# Altium PCB RHR077_GFC_ECAT_LED_REV1.PcbDoc
Units mil, origin at the board's own origin, x right, y up, seen from the top; angles counter-clockwise.
Board outline 1968.5 x 984.25 mil, 2 copper layers (Top Layer, Bottom Layer); 37 components, 25 nets, 138 pads, 128 vias.
Unrouted connection lines stored in the file: 21.
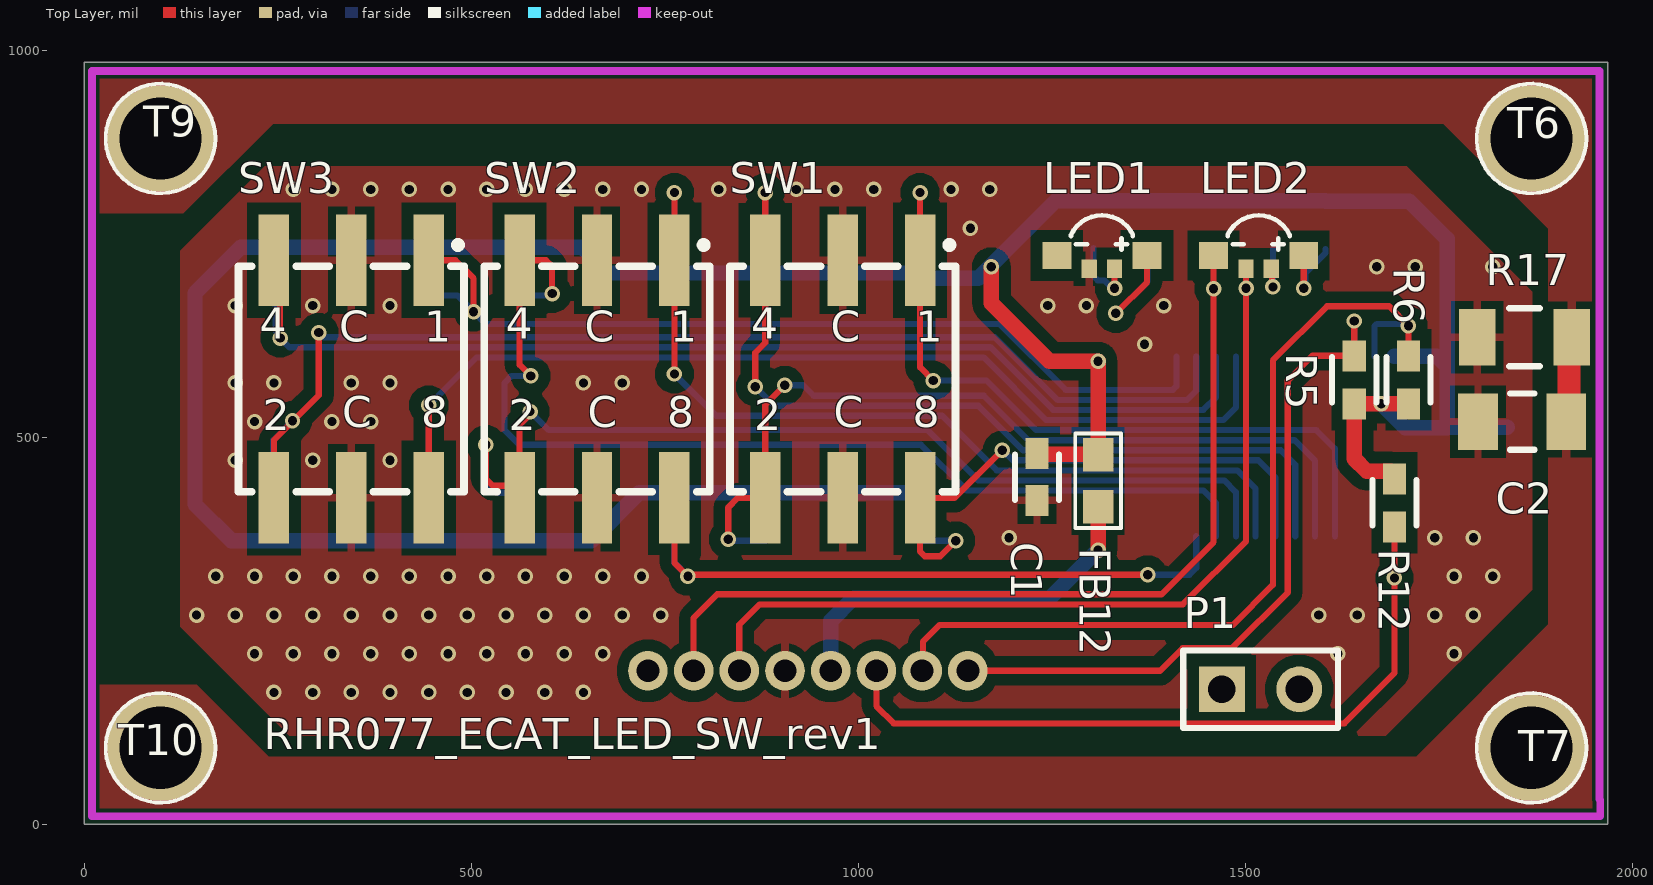
[diagram p0: Top Layer view]
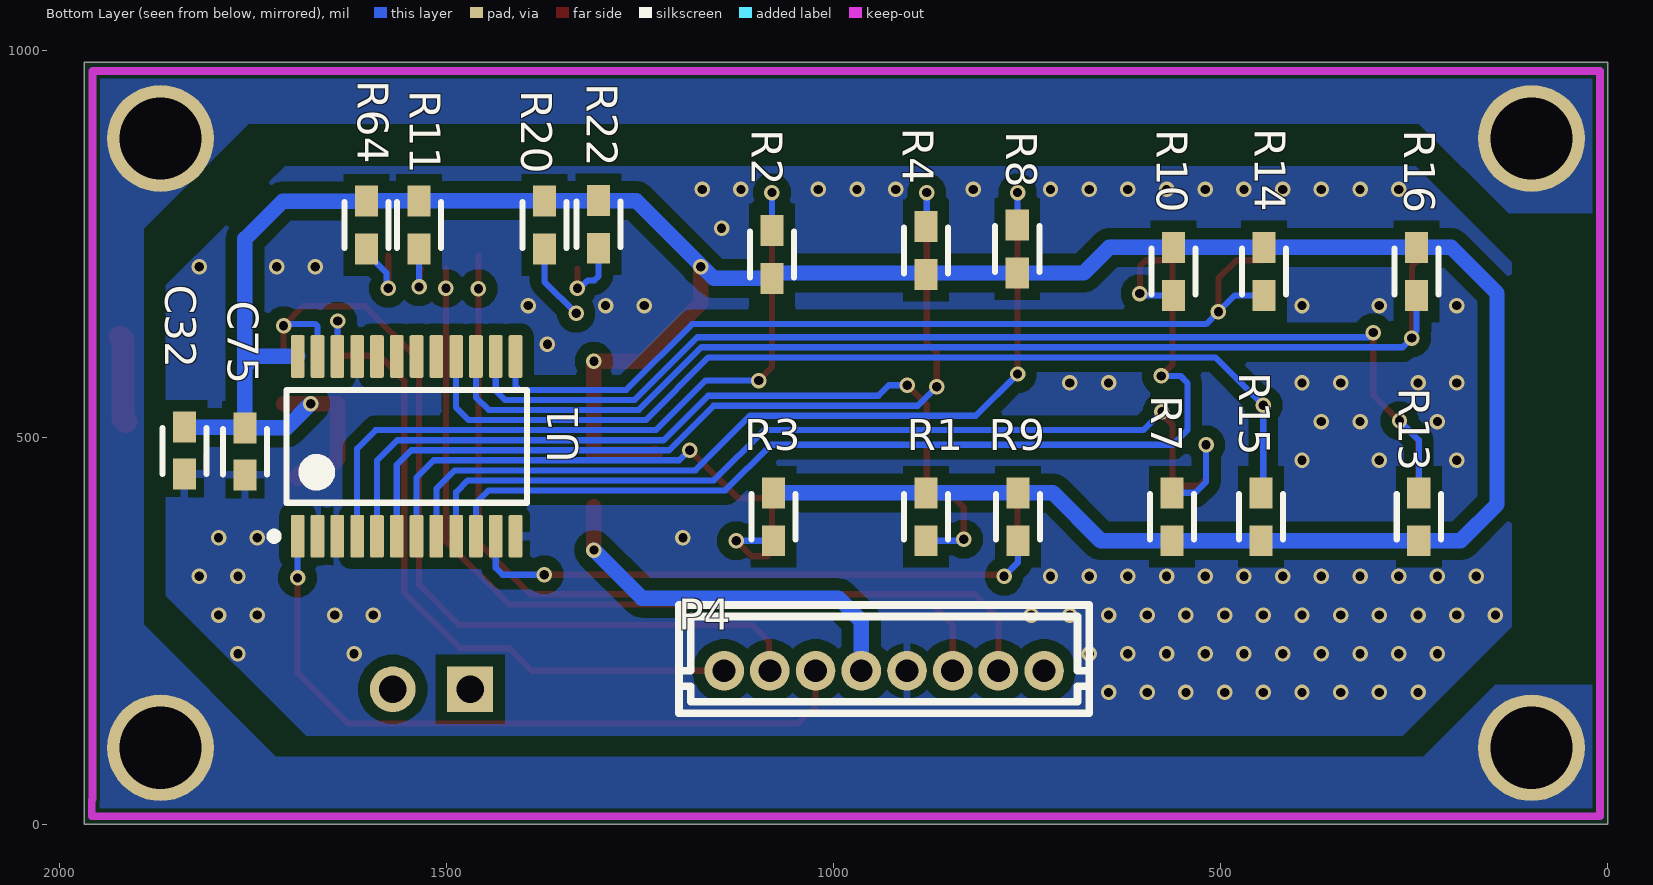
[diagram p1: Bottom Layer view, seen from below]
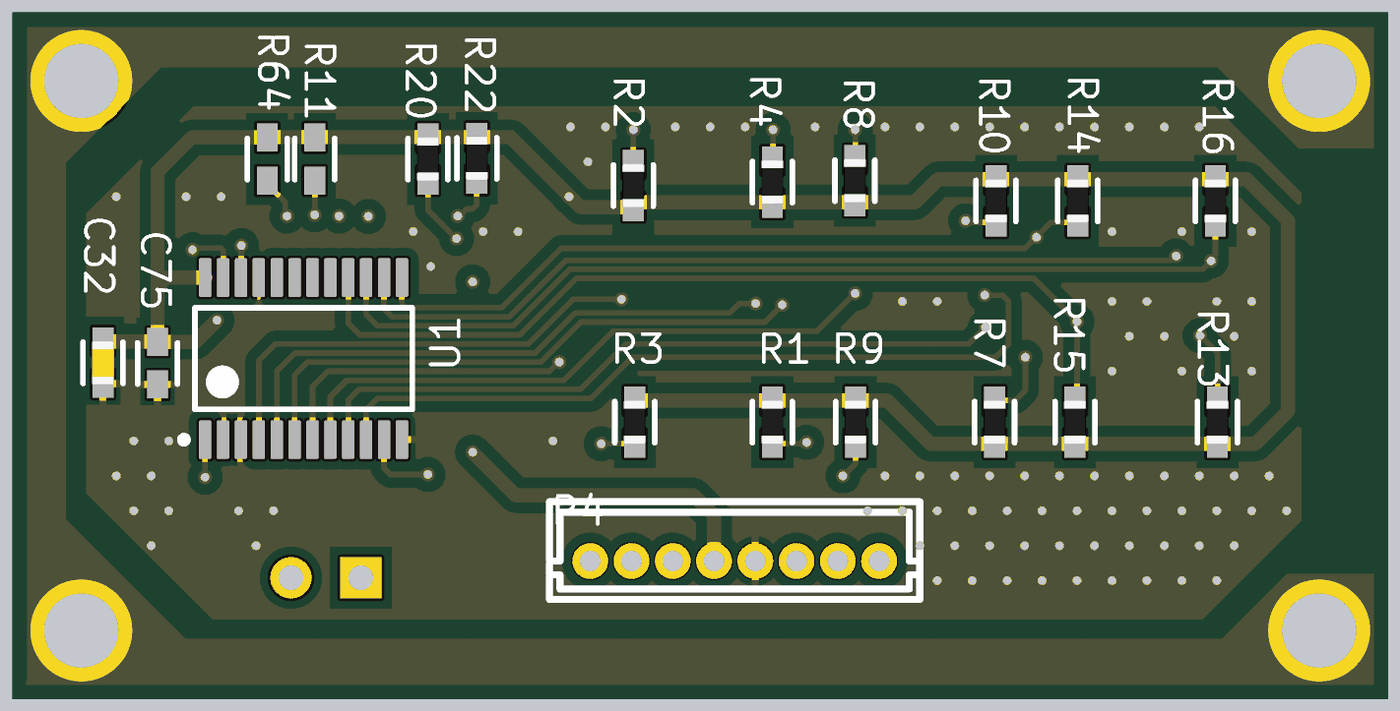
[diagram p2: 3D render of the assembled board from below, using the file's embedded part models]

## Layer stack, top to bottom
Top Solder: solder mask 0.4, Solder Resist, Dk 3.5
Top Layer: signal copper 1.4
Dielectric1: dielectric 12.6, FR-4, Dk 4.8
Bottom Layer: signal copper 1.4
Bottom Solder: solder mask 0.4, Solder Resist, Dk 3.5

## Board outline
0,0 0,984.25 1968.5,984.25 1968.5,0

## Design rules (kind name [scope] priority, off if disabled: settings)
Clearance Clearance_1 [InNet('DGND') And InPolygon] p1: gap=15 ignorepadtopadclearanceinfootprint=FALSE
Clearance [All] p2: gap=5 ignorepadtopadclearanceinfootprint=FALSE
PolygonConnect PolygonConnect_1 [InNet('EARTH')] p1: thpad.connectstyle=Direct thpad.reliefconductorwidth=10 thpad.reliefentries=4 thpad.polygonreliefangle="90 Angle" thpad.airgapwidth=10 smdpad.connectstyle=Relief smdpad.reliefconductorwidth=10 smdpad.reliefentries=4 smdpad.polygonreliefangle="90 Angle" smdpad.airgapwidth=10 via.connectstyle=Relief via.reliefconductorwidth=10 via.reliefentries=4 via.polygonreliefangle="90 Angle" via.airgapwidth=10
PolygonConnect [All] p2: connectstyle=Relief reliefconductorwidth=10 reliefentries=4 polygonreliefangle="90 Angle" airgapwidth=10
RoutingVias [All] p1: holewidth=28 width=50 viastyle="Through Hole" minholewidth=28 minwidth=50 maxholewidth=28 maxwidth=50
SilkToSolderMaskClearance SilkscreenOverComponentPads [IsPad] p1: minsilkscreentomaskgap=10 clearancetoexposedcopper=TRUE
SolderMaskExpansion [All] p1: expansion=4 istentingtop=FALSE
Width [All] p1: maxlimit=100 minlimit=5 preferedwidth=10
29 further rules are at their usual default settings.

## Components (designator, comment, footprint, x,y, rotation, side; value= is the part's Value field where it differs from the comment)
C1 "Capacitor_0603" CAPC1608X092N_0603 1231,448 r270 top value=10uF/25V
C2 "Capacitor_1206" CAPC3216X156N_1206 1858,520 r0 top value=0.01u
C32 "Capacitor_0603" CAPC1608X092N_0603 1839,482 r270 bottom value=0.1uF/50V
C75 "Capacitor_0603" CAPC1608X092N_0603 1761,481 r270 bottom value=0.1u
FB12 "FBC0603" FBC0603 1310,410 r90 top value="600 Ohms @ 100MHz"
LED1 "TJ-S3210SW5TCGLC2R2G-A5" LED-SMD_4P-L3.2-W1.5_TJ-S3210SW5TCGLC2R2G 1315,726.15 r0 top locked
LED2 "TJ-S3210SW5TCGLC2R2G-A5" LED-SMD_4P-L3.2-W1.5_TJ-S3210SW5TCGLC2R2G 1517.5,726.15 r0 top locked
P1 "Header 2" HDR1X2 1470,174 r0 top
P4 "HC-ZH-8PWT" CONN-TH_HC-ZH1.5-8A 935,198 r180 bottom locked
R1 "Resistor_0402" RESC1608X055N_0603 881,397.02 r90 bottom value=10k
R2 "Resistor_0402" RESC1608X055N_0603 1080,736.02 r270 bottom value=10k
R3 "Resistor_0402" RESC1608X055N_0603 1078,397.02 r90 bottom value=10k
R4 "Resistor_0402" RESC1608X055N_0603 881,741.02 r270 bottom value=10k
R5 "Resistor_0402" RESC1608X055N_0603 1641,574 r270 top value=10k
R6 "Resistor_0402" RESC1608X055N_0603 1711,573.98 r270 top value=10k
R7 "Resistor_0402" RESC1608X055N_0603 563,397.02 r270 bottom value=10k
R8 "Resistor_0402" RESC1608X055N_0603 763,743 r270 bottom value=10k
R9 "Resistor_0402" RESC1608X055N_0603 762,397.02 r90 bottom value=10k
R10 "Resistor_0402" RESC1608X055N_0603 561,714 r90 bottom value=10k
R11 "Resistor_0603" RESC1608X055N_0603 1536,774 r90 bottom value=1k
R12 "Resistor_0402" RESC1608X055N_0603 1693,415 r90 top value=10k
R13 "Resistor_0402" RESC1608X055N_0603 244,397.02 r270 bottom value=10k
R14 "Resistor_0402" RESC1608X055N_0603 444,714 r90 bottom value=10k
R15 "Resistor_0402" RESC1608X055N_0603 448,397.02 r270 bottom value=10k
R16 "Resistor_0402" RESC1608X055N_0603 247,714 r90 bottom value=10k
R17 "Resistor_1206" RESC3216X070N_1206 1861,629 r180 top value=1Meg
R20 "Resistor_0603" RESC1608X055N_0603 1374,773.98 r90 bottom value=1k
R22 "Resistor_0603" RESC1608X055N_0603 1304,775 r90 bottom value=1k
R64 "Resistor_0603" RESC1608X055N_0603 1604,773.98 r90 bottom value=1k
SW1 "SKAR-16S" SW-SMD_SM_STAR-10S 980,575 r0 top locked
SW2 "SKAR-16S" SW-SMD_SM_STAR-10S 662.5,575 r0 top locked
SW3 "SKAR-16S" SW-SMD_SM_STAR-10S 345,575 r0 top locked
T6 "TP" FIX-2.5 1870.08,885.83 r0 top locked
T7 "TP" FIX-2.5 1870.08,98.43 r0 top locked
T9 "TP" FIX-2.5 98.43,885.83 r0 top locked
T10 "TP" FIX-2.5 98.43,98.43 r0 top locked
U1 "XL9535" XNLD-TSSOP24_N 1552,488 r90 bottom

## Footprints (in the part's own frame and the unit in brackets; to place one, negate y for a bottom-side part, rotate by r counter-clockwise, add the part's x,y. Pads: shape width x height; smd on the part's side, far side on the other; paste and mask are expansions set on the pad)
CAPC1608X092N_0603 [mil] "Chip Capacitor, 0603"
  round 10 on Mech3: 0(0,0)
  rect 40x30 smd: 1(-30.98,0) 2(30,0)
  silkscreen extent -30,-29 30,29, body extent -31,-16 31,16, height 36
CAPC3216X156N_1206 [mm] "Chip Capacitor, 1206"
  round 0.254 on Mech3: 0(0,0)
  rect 1.3x1.85 smd: 1(-1.45,0) 2(1.45,0)
  silkscreen extent -0.4,-0.92 0.4,0.93, body extent -1.6,-0.8 1.6,0.8, height 1.52
CONN-TH_HC-ZH1.5-8A [mm]
  round 1.3 hole 0.75 paste-2539.97 mask+0.05: 1(-5.25,0) 2(-3.75,0) 3(-2.25,0) 4(-0.75,0) 5(0.75,0) 6(2.25,0) 7(3.75,0) 8(5.25,0)
  silkscreen extent -6.73,-1.4 6.73,2.16
FBC0603 [mm]
  rect 1.1x1 smd: 1(0,0)
  rect 1.1x1 smd mask+0.102: 2(1.7,0)
  silkscreen extent -0.7,-0.75 2.4,0.75, body extent 0.05,-0.41 1.65,0.41, height 0.84
FIX-2.5 [mm]
  round 3.5 hole 2.7: 1(0,0)
  silkscreen extent -1.8,-1.8 1.8,1.8
HDR1X2 [mm] "Connector; Header; 2 Position"
  rect 1.5x1.5 hole 0.9: 1(0,0)
  round 1.5 hole 0.9: 2(2.54,0)
  silkscreen extent -1.27,-1.27 3.81,1.27
LED-SMD_4P-L3.2-W1.5_TJ-S3210SW5TCGLC2R2G [mm]
  rect 0.95x0.9 smd: 1(1.48,0.216) 4(-1.48,0.216)
  rect 0.5x0.6 smd: 2(0.415,-0.216) 3(-0.415,-0.216)
  silkscreen extent -1.02,0.41 1.02,1.53
RESC1608X055N_0603 [mil] "Chip Resistor, 0603"
  round 10 on Mech3: 0(0,0)
  rect 40x30 smd: 1(-30.98,0) 2(30.98,0)
  silkscreen extent -30,-29 30,29, body extent -31,-16 31,16, height 22
RESC3216X070N_1206 [mm] "Chip Resistor, 1206"
  round 0.254 on Mech3: 0(0,0)
  rect 1.2x1.85 smd: 1(-1.55,0) 2(1.55,0)
  silkscreen extent -0.5,-0.95 0.5,0.95, body extent -1.55,-0.75 1.55,0.75, height 0.7
SW-SMD_SM_STAR-10S [mm]
  rect 1x3 smd paste+0 mask+0.05: 1(2.54,3.9) 2(-2.54,-3.9) 4(-2.54,3.9) 8(2.54,-3.9) C(0,-3.9) C(0,3.9)
  silkscreen extent -3.7,-3.7 3.7,4.5
XNLD-TSSOP24_N [mm] "SOP, 24-Leads, Body 7.9x4.5mm, Pitch 0.65mm, IPC Medium Density"
  rrect22% 1.4x0.45 smd: 1(-2.95,3.575) 2(-2.95,2.925) 3(-2.95,2.275) 4(-2.95,1.625) 5(-2.95,0.975) 6(-2.95,0.325) 7(-2.95,-0.325) 8(-2.95,-0.975) 9(-2.95,-1.625) 10(-2.95,-2.275) 11(-2.95,-2.925) 12(-2.95,-3.575) 13(2.95,-3.575) 14(2.95,-2.925) 15(2.95,-2.275) 16(2.95,-1.625) 17(2.95,-0.975) 18(2.95,-0.325) 19(2.95,0.325) 20(2.95,0.975) 21(2.95,1.625) 22(2.95,2.275) 23(2.95,2.925) 24(2.95,3.575)
  silkscreen extent -3.07,-3.95 1.85,4.47, body extent -3.21,-3.9 3.21,3.9, height 1

## Part data
C1 C32: Package=0603, PartNumber=C0603C104M5RACTU, TempCo=[tempco], Tolerance=[tol], Voltage Rating=[voltage], SupplierDescription="CAP CER 0.1UF 50V X7R 0603"
C2: "Capacitor, MLCC", Package=1206, PartNumber=C1206C103KCRACTU, TempCo=[tempco], Tolerance=[tol], Voltage Rating=[voltage], ComponentLink1Description=Datasheet, SupplierDescription="CAP CER 10000PF 500V X7R 1206"
C75: "Capacitor, MLCC", Manufacturer=KEMET, Package=0603, PartNumber=C0603C104M5RACTU, TempCo=[tempco], Tolerance=[tol], Voltage Rating=[voltage], ComponentLink1Description=Datasheet, SupplierDescription="CAP CER 0.1UF 50V X7R 0603"
FB12: PartNumber=PE-0603PFB121ST, SupplierDescription="FERRITE BEAD 600 OHM 0603 1LN"
LED1 LED2: Color Temperature=-, Forward Current=20mA, JLCPCB Part Class="Extended Part", Add into BOM=yes, Convert to PCB=yes, Datasheet=https://atta.szlcsc.com/upload/public/pdf/source/20200618/C601680_03E6561E1E751F1BA8F42F573334542B.pdf, Device=TJ-S3210SW5TCGLC2R2G-A5, Diode Configuration=-, Manufacturer Part=TJ-S3210SW5TCGLC2R2G-A5, Supplier=LCSC, Supplier Footprint=SMD,1.5x3.2mm, Supplier Part=C601680, Symbol=TJ-S3210SW5TCGLC2R2G-A5
P1: "Header, 2-Pin", LatestRevisionDate=17-Jul-2002, LatestRevisionNote="Re-released for DXP Platform.", Publisher="Altium Limited"
P4: library part "Header 8", "Header, 8-Pin", LatestRevisionDate=17-Jul-2002, LatestRevisionNote="Re-released for DXP Platform.", Publisher="Altium Limited"
R1 R2 R3 R4 R5 R6 R7 R8 R9 R10 R12 R13 R14 R15 R16: "Resistor, Standard", Manufacturer=Panasonic, Package=0402, PartNumber=ERJ-2RKF1002X, Power Rating=[power], TempCo=[tempco], Tolerance=tol, ComponentLink1Description=Datasheet, SupplierDescription="RES SMD 10K OHM 1% 1/10W 0402"
R11 R20 R22 R64: "Resistor, Standard", Manufacturer=Yageo, Package=0603, PartNumber=RC0603FR-071KL, Power Rating=[power], TempCo=[tempco], Tolerance=tol, ComponentLink1Description=Datasheet
  R11 R64: SupplierDescription="RES SMD 1K OHM 1% 1/10W 0603"
  R20 R22: SupplierDescription="RES 1k OHM 1% 1/10W 0603"
R17: "Resistor, Standard", Package=1206, PartNumber=RC1206FR-071ML, TempCo=[tempco], Tolerance=tol, ComponentLink1Description=Datasheet, SupplierDescription="RES SMD 1M OHM 1% 1/4W 1206"
SW1 SW2 SW3: library part MSDR-16H1, "Mini Rotary DIP Switch, 16 Postions, Right Angle Thru-Hole, -60 to 125 degC, 6-Pin THT, RoHS", Manufacturer="SUNGMUN ELECTRONICS", Manufacturer URL=http://www.sungmun.co.kr/, Mounting=ThroughHole, Part No=MSDR-16H1
U1: "Remote 16-Bit I2C and SMBus Low-Power I/O Expander with Interrupt Output & Config. Registers, 2.3 to 5.5 V, -40 to 85 degC, 24-pin TSSOP, Green (RoHS & no Sb/Br)", Manufacturer=XINLUDA, Max Frequency(kHz)=400, Voltage Nodes(V)="5.5, 3.6, 2.7, 2.5", # of I/Os=16, Code_JEDEC=MO-153, ComponentLink1Description="Manufacturer URL", ComponentLink1URL=https://www.xinluda.com/, DatasheetVersion=SCPS121D, Eco-Plan="Green (RoHS & no Sb/Br)", fSCLK(Max)(MHz)=0.4, I2C Address="0100 xxx", Interrupt Output=Yes, Mounting Technology="Surface Mount", PackageDescription="24-Pin Thin Small Outline Package 0.65 mm Pitch", PackageReference=PW0024A, PackageVersion="revG, Feb-2011", PartNumber=XL9535, Push-Pull I/O Type=Yes, Reset Input=No, SubFamily="I2C IO Expander", Vcc range(V)="2.5 to 5.5", VCC(Max)(V)=5.5, VCC(Min)(V)=2.5

## Via types
v1: diameter 20, hole 12, Top Layer to Bottom Layer, tented both sides, 128 vias

## Nets (pads, with @x,y where several pads share a name; then routed paths per layer and width w, separated by ;. In a path a pad name is that pad's centre, name@x,y a point inside that pad or via, vN(x,y) a via of type N, cw(c..) or ccw(c..) an arc to the next point about the centre after c; other vN are vias at no path point)
+3.3V: C1.1 C32.1 C75.1 FB12.2 R1.2 R2.2 R3.2 R4.2 R5.2 R6.2 R7.2 R8.2 R9.2 R10.2 R11.2 R12.2 R13.2 R14.2 R15.2 R16.2 R20.2 R22.2 R64.2 U1.24 | length 4093.1
  Top Layer w20: v1(1172,720) 1172,673 1247,598 v1(1310,598) FB12.2 1308.97,477.96 1232.03,477.96 C1.1 ; R12.2 1693,450.98 1688,455.98 1657.02,455.98 1641,472 R5.2 v1(1676,543.01) R6.2
  Bottom Layer w20: R3.2 R1.2 R9.2 717,428 655.03,366.03 R7.2 R15.2 R13.2 189.97,366.03 143,413 143,686 201.98,744.98 R16.2 R14.2 R10.2 644.02,744.98 676.98,712.02 R8.2 1075,712.02 1080,707.02 R2.2 1155.03,705.03 1255.48,805.48 1603.49,805.48 R64.2 1712.03,804.97 1761,756 1761,591 ; v1(1676,543.01) 1707.02,511.98 C75.1 ; U1.24 1747.86,604.14 1761,591 ; C32.1 1838.5,512.48 1761.5,512.48 C75.1 ; C75.1 1761,591
ADD_A1: R2.1 SW1.1 U1.4 | length 967.6
  Top Layer w8: v1(1080,816) SW1.1 1080,590 v1(1097,573)
  Bottom Layer w8: R2.1 v1(1080,816) ; v1(1097,573) 1166,573 1230,509 1592,509 1615.98,485.02 U1.4
ADD_A2: R1.1 SW1.2 U1.5 | length 1123.4
  Top Layer w8: v1(832,368) 832,409 844.46,421.46 SW1.2 880,542 v1(905,567)
  Bottom Layer w8: v1(832,368) 833.97,366.03 R1.1 ; v1(905,567) 928.9,567 942.4,553.5 1162.5,553.5 1220,496 1564,496 1590.39,469.61 U1.5
ADD_A4: R4.1 SW1.4 U1.6 | length 1132.7
  Top Layer w8: v1(867,565) 867,609 880,622 SW1.4 v1(880,816)
  Bottom Layer w8: v1(867,565) 891.5,540.5 1155.37,540.5 1212.87,483 1546,483 1564.8,464.2 U1.6 ; v1(880,816) 880,773 R4.1
ADD_A8: R3.1 SW1.8 U1.7 | length 749.3
  Top Layer w8: v1(1126,366) 1106,346 1086,346 1080,352 SW1.8 1124.46,421.46 v1(1186,483)
  Bottom Layer w8: R3.1 v1(1126,366) ; v1@1186.31,483.31 1199.62,470 1517,470 1539.2,447.8 U1.7
ADD_B1: R8.1 SW2.1 U1.8 | length 1154.3
  Top Layer w8: v1@760,579 v1(762.5,581.5) SW2.1 v1(762.5,816)
  Bottom Layer w8: v1(762.5,581.5) 816.5,527.5 1108.5,527.5 1179,457 1490,457 1513.61,433.39 U1.8 ; v1(762.5,816) 762.5,774.48 R8.1
ADD_B2: R7.1 SW2.2 U1.9 | length 1324.8
  Top Layer w8: v1(519,490) 519,446 528,437 546.96,437 SW2.2 562.5,516.25 576,529.75 v1(576,533)
  Bottom Layer w8: v1(519,490) 519,442 533,428 R7.1 ; v1(576,533) 600,509 1090,509 1155,444 1473,444 1488.02,428.98 U1.9
ADD_B4: R10.1 SW2.4 U1.10 | length 1383.9
  Top Layer w8: v1(577,579) 562.5,593.5 SW2.4 596.46,728.54 604.51,720.49 v1(604.51,685.51)
  Bottom Layer w8: R10.1 602.02,683.02 v1(604.51,685.51) v1@607,688 ; v1(577,579) 552,579 543,570 543,509 562,490 1081,490 1140,431 1446,431 1462.43,414.57 U1.10
ADD_B8: R9.1 SW2.8 U1.11 | length 862.9
  Top Layer w8: SW2.8 762.5,337.5 778,322 v1(1374,322)
  Bottom Layer w8: R9.1 762,338 v1(780,320) ; v1(1374,322) 1428,322 1436.84,330.84 U1.11
ADD_C1: R14.1 SW3.1 U1.13 | length 1168.9
  Top Layer w8: SW3.1 479.46,728.54 503,705 v1(503,662)
  Bottom Layer w8: R14.1 481.98,683.02 v1(503,662) 519,646 1183,646 1268,561 1406.57,561 1411.25,565.69 U1.13
ADD_C2: R13.1 SW3.2 U1.14 | length 1560
  Top Layer w8: SW3.2 245,496 303,554 v1(303,635)
  Bottom Layer w8: R13.1 244,496 v1(269,521) ; v1(303,635) 309,629 1176.38,629 1257.38,548 1425,548 1436.84,559.84 U1.14
ADD_C4: R16.1 SW3.4 U1.15 | length 1468.8
  Top Layer w8: SW3.4 253,720.54 v1(253,628)
  Bottom Layer w8: R16.1 247,637.25 253,631.25 v1(253,628) 265,616 1171,616 1252,535 1446,535 1462.43,551.43 U1.15
ADD_C8: R15.1 SW3.8 U1.16 | length 1410.2
  Top Layer w8: SW3.8 v1(445,541) v1@446,542
  Bottom Layer w8: R15.1 445,431 v1(445,541) 507,603 1162,603 1243,522 1472,522 1488.02,538.02 U1.16
DGND: C1.2 C2.1 C32.2 C75.2 LED1.3 P4.5 R17.2 SW1.C SW2.C SW3.C U1.2 U1.3 U1.12 U1.21
  other v1: 245,170 295,170 345,170 395,170 445,170 495,170 545,170 595,170 645,170 220,220 270,220 320,220 370,220 420,220 470,220 520,220 570,220 620,220 670,220 1620,220 1770,220 145,270 195,270 245,270 295,270 345,270 395,270 445,270 495,270 545,270 595,270 645,270 695,270 745,270 1595,270 1645,270 1745,270 1795,270 170,320 220,320 270,320 320,320 370,320 420,320 470,320 520,320 570,320 620,320 670,320 720,320 1770,320 1820,320 1195,370 1745,370 1795,370 195,470 295,470 395,470 220,520 320,520 370,520 195,570 245,570 345,570 395,570 645,570 695,570 1370,620 195,670 295,670 395,670 1245,670 1295,670 1395,670 1670,720 1720,720 1820,720 1145,770 270,820 320,820 370,820 420,820 470,820 520,820 570,820 620,820 670,820 720,820 820,820 920,820 970,820 1020,820 1120,820 1170,820
EARTH: C2.2 R17.1 T6.1 T7.1 T9.1 T10.1 | length 111.9
  Top Layer w30: C2.2 1918.56,523.47 1918.56,625.53 R17.1
ERR: LED2.4 P4.7 | length 1151.2
  Top Layer w8: P4.7 787.37,266.37 818,297 1392,297 1459.23,364.23 v1(1459.23,691.77) LED2.4
GPIO_EXTENDER_INT: P4.3 R12.1 U1.1 | length 994.2
  Top Layer w8: P4.3 1023.59,152.41 1046,130 1628,130 1693,195 v1(1693,318) R12.1
  Bottom Layer w8: U1.1 1692.87,371.73 1692.87,318.13 v1(1693,318)
I2C1_SCL_ROTARY: P4.1 R5.1 U1.22 | length 919.5
  Top Layer w8: P4.1 1390.17,198 1419.17,227 1483,227 1555,299 1555,573 1586.98,604.98 R5.1 v1(1641,650)
  Bottom Layer w8: v1(1641,650) 1641.28,649.72 1641.28,604.43 U1.22
I2C1_SDA_ROTARY: P4.2 R6.1 U1.23 | length 1149.3
  Top Layer w8: P4.2 1083.59,198.96 1083.59,235.59 1105,257 1484,257 1536,309 1536,599 1606,669 1686,669 v1(1711,644) R6.1
  Bottom Layer w8: U1.23 1667.16,643.16 1670.3,646.3 1708.7,646.3 v1(1711,644)
MCU_3.3V: FB12.1 P4.4 | length 503.9
  Top Layer w20: v1(1310,354) FB12.1
  Bottom Layer w20: P4.4 964.52,262.52 994,292 1248,292 v1(1310,354)
NetLED1_1: LED1.1 R20.1 | length 191.3
  Top Layer w8: v1(1333,660) 1373.27,700.27 LED1.1
  Bottom Layer w8: v1(1333,660) 1374,701 R20.1
NetLED1_2: LED1.2 R22.1 | length 95.2
  Top Layer w8: v1(1331.34,692.34) LED1.2
  Bottom Layer w8: R22.1 1304,708 1309.66,702.34 1318.09,702.34 1328.09,692.34 v1(1331.34,692.34)
NetLED2_1: LED2.1 R64.1 | length 105.2
  Top Layer w8: LED2.1 v1(1575.77,692.23) v1@1576,692
  Bottom Layer w8: v1(1575.77,692.23) 1578.07,694.53 1578.07,712.07 1604,738 R64.1
NetLED2_2: LED2.2 R11.1 | length 76.4
  Top Layer w8: LED2.2 1534.92,716.57 1534.92,695.08 v1(1536,694)
  Bottom Layer w8: R11.1 v1(1536,694) v1@1538,692
RUN: LED2.3 P4.6 | length 1111.3
  Top Layer w8: P4.6 846.41,257.41 872.71,283.71 1419.71,283.71 1501.16,365.16 v1(1501.16,692.16) LED2.3
pads on no net: C1.0 C2.0 C32.0 C75.0 LED1.4 P1.1 P1.2 P4.8 R1.0 R2.0 R3.0 R4.0 R5.0 R6.0 R7.0 R8.0 R9.0 R10.0 R11.0 R12.0 R13.0 R14.0 R15.0 R16.0 R17.0 R20.0 R22.0 R64.0 U1.17 U1.18 U1.19 U1.20

## Polygon pours and split planes (outlines as drawn)
DGND on Bottom Layer "DGND_L02_P000" (solid, pour order 0): 248,850 1709,850 1863,696 1863,295 1682,114 265,114 124,255 124,726
EARTH on Bottom Layer "EARTH_L02_P003" (solid, remove dead copper, pour order 3): 1756,905 1892,769 1892,258 1721,87 238,87 145,180 -62,180 -62,-112 -41,-91 2058,-91 2058,1025 2062,1029 2000,1091 -54,1091 -54,876 -67,863 7,789 128,789 244,905
DGND on Top Layer "DGND_L01_P001" (solid, pour order 1): 233,850 1709,850 1871,688 1871,303 1682,114 265,114 124,255 124,741
EARTH on Top Layer "EARTH_L01_P002" (solid, remove dead copper, pour order 2): 1756,905 1892,769 1892,258 1721,87 238,87 145,180 -62,180 -62,-112 -41,-91 2058,-91 2058,1025 2062,1029 2000,1091 -54,1091 -54,876 -67,863 7,789 128,789 244,905

## Keep-outs
Keep-Out Layer:
  lines w10: 10,10 10,973 1958,973 1958,32 1959,31 1959,10 10,10

## Silkscreen, mask and mechanical layers (free items; w line width, h text height)
Top Overlay:
  text "RHR077_ECAT_LED_SW_rev1" at 232,96.66 h40
Mechanical 1:
  lines w10: 0,0 1968.5,0 1968.5,36.5 1968.5,984.25 0,984.25 0,0

## Dimensions
1620,224 to 1968.5,0 on Top Overlay
1420,124 to 1620,224 on Top Overlay
1420,124 to 1968.5,0 on Top Overlay
1620,124 to 1968.5,36.5 on Top Overlay
0,984.25 to 0,0 on Mechanical 1
0,984.25 to 1968.5,36.5 on Mechanical 1

## Text inside footprints (layer, text, board x,y; h text height)
SW1: Top Overlay "1" at 1074.49,623.02 h40; Top Overlay "C" at 964.25,623.02 h40; Top Overlay "4" at 861.89,626.96 h40; Top Overlay "C" at 968.19,512.78 h40; Top Overlay "2" at 865.83,508.85 h40; Top Overlay "8" at 1070.55,512.78 h40
SW2: Top Overlay "1" at 756.99,623.02 h40; Top Overlay "C" at 646.75,623.02 h40; Top Overlay "4" at 544.39,626.96 h40; Top Overlay "C" at 650.69,512.78 h40; Top Overlay "2" at 548.33,508.85 h40; Top Overlay "8" at 753.05,512.78 h40
SW3: Top Overlay "1" at 439.49,623.02 h40; Top Overlay "C" at 329.25,623.02 h40; Top Overlay "4" at 226.89,626.96 h40; Top Overlay "C" at 333.19,512.78 h40; Top Overlay "2" at 230.83,508.85 h40; Top Overlay "8" at 435.55,512.78 h40